# Altium PCB STM8S103.PcbDoc
Units mil, origin at the board's own origin, x right, y up, seen from the top; angles counter-clockwise.
Board outline 1305 x 1305 mil, 2 copper layers (Top Layer, Bottom Layer); 35 components, 38 nets, 164 pads, 62 vias.
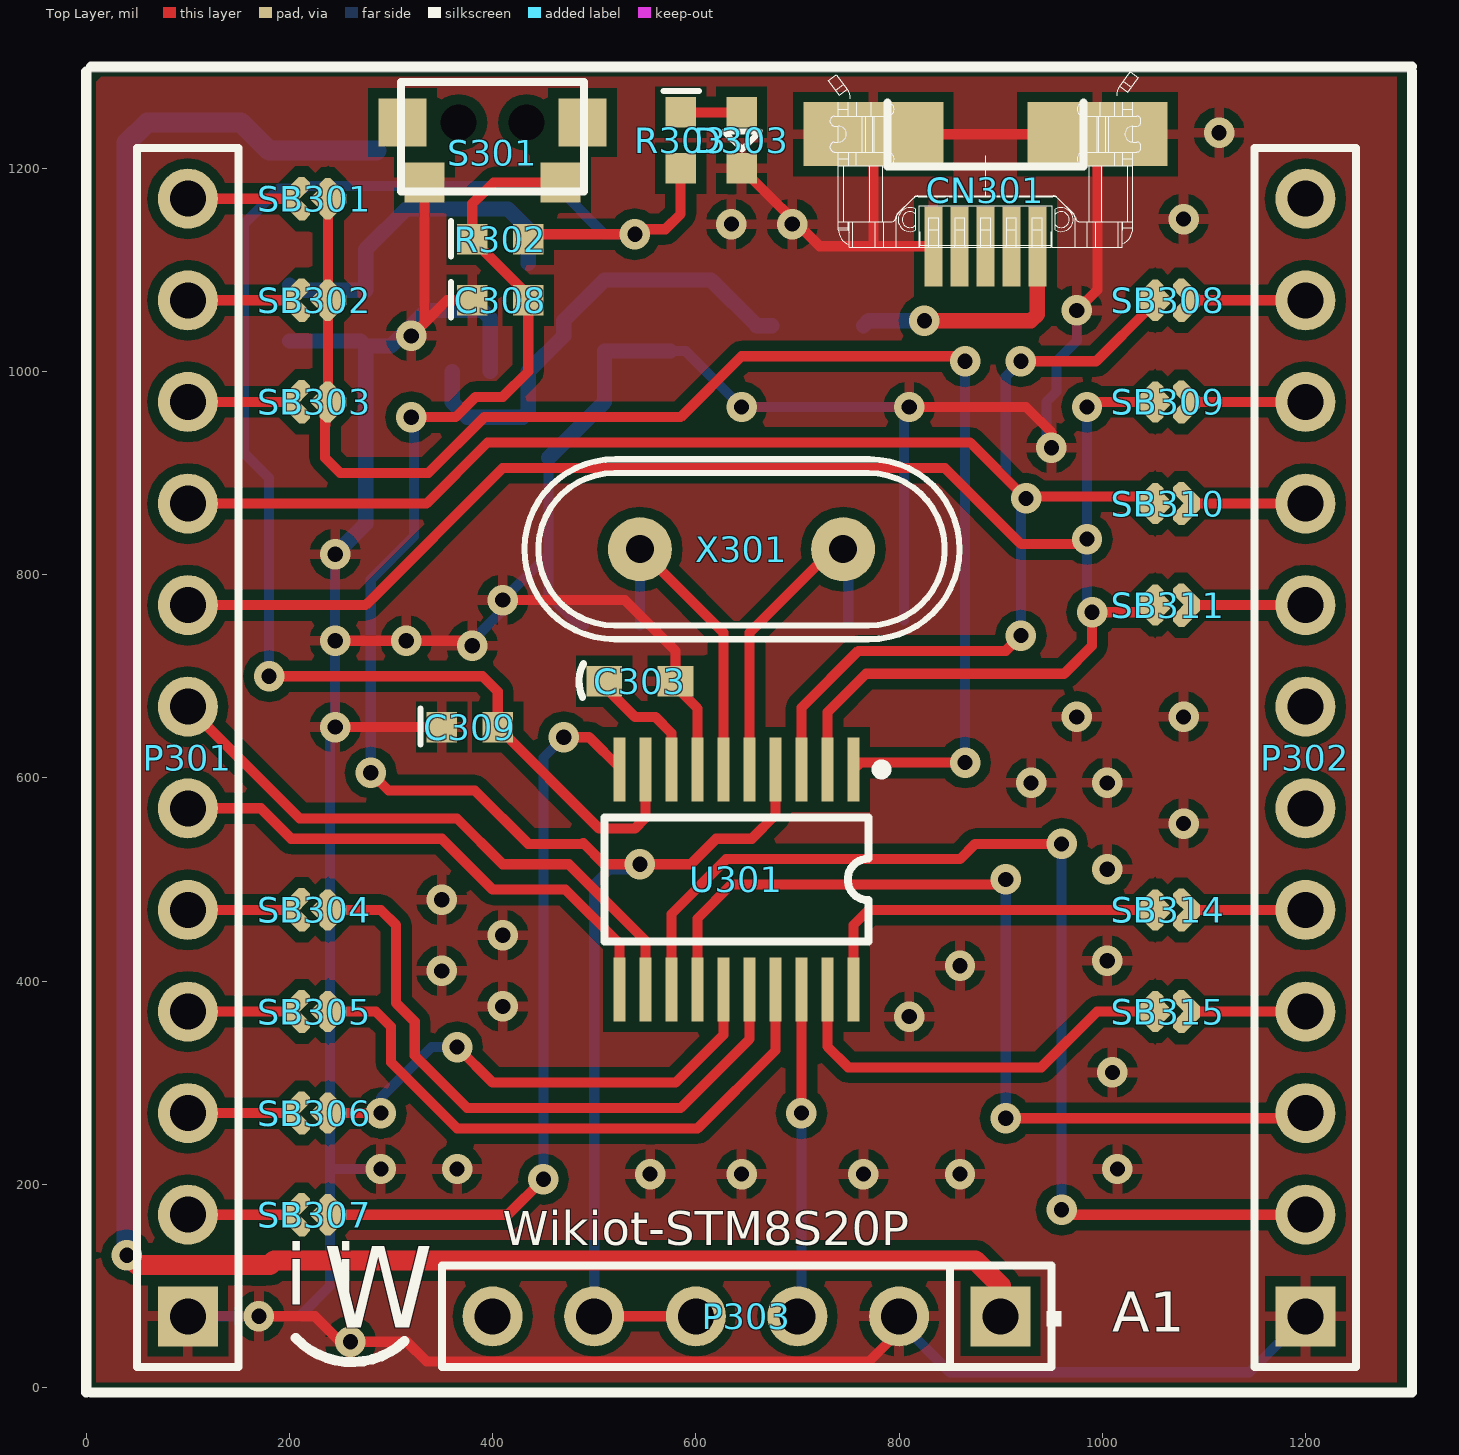
[diagram p0: Top Layer view]
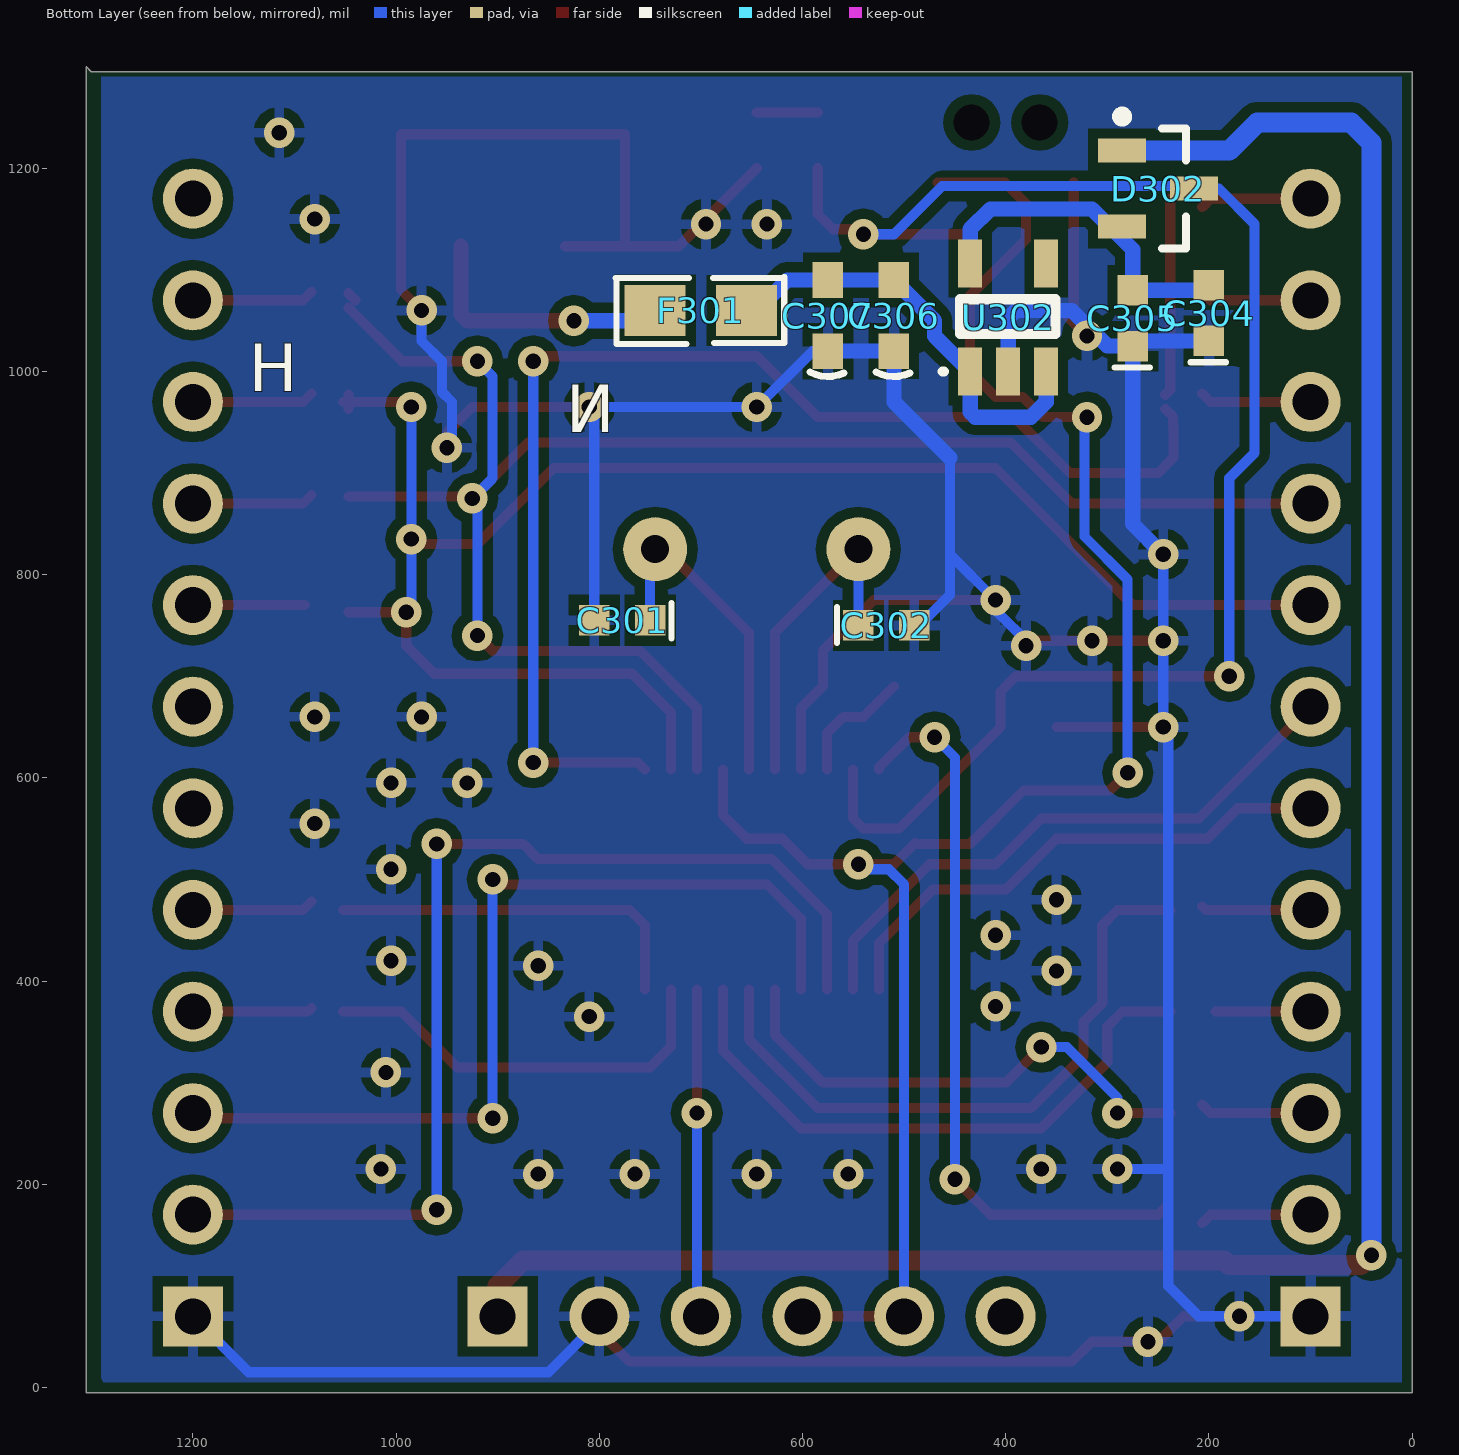
[diagram p1: Bottom Layer view, seen from below]

## Layer stack, top to bottom
Top Solder: solder mask 0.4, Solder Resist, Dk 3.5
Top Layer: signal copper 1.4
Dielectric 1: dielectric 12.6, FR-4, Dk 4.8
Bottom Layer: signal copper 1.4
Bottom Solder: solder mask 0.4, Solder Resist, Dk 3.5

## Board outline
0,-5 0,1295 1300,1295 1305,1300 1305,-5

## Design rules (kind name [scope] priority, off if disabled: settings)
Clearance [All] p1: gap=10
PolygonConnect [All] p1: connectstyle=Relief reliefconductorwidth=10 reliefentries=4 polygonreliefangle="90 Angle" airgapwidth=10
RoomDefinition STM8S103 [InComponentClass('STM8S103')] p1: confinementstyle=ConfineIn formatcopy=TRUE lockcomponents=FALSE outline 5,-15 1300,-15 1300,1305 5,1305
RoutingVias [All] p1: holewidth=12 width=30 viastyle="Through Hole" minholewidth=12 minwidth=25 maxholewidth=28 maxwidth=50
SolderMaskExpansion [All] p1: expansion=4
UnpouredPolygon [All] p1: allowunpoured=FALSE
Width [All] p1: maxlimit=50 minlimit=10 preferedwidth=10
29 further rules are at their usual default settings.

## Components (designator, comment, footprint, x,y, rotation, side; value= is the part's Value field where it differs from the comment)
C301 "20pF" 0603M 750,755 r0 bottom
C302 "20pF" 0603M 545,750 r180 bottom
C303 "0.1uF" C0603L 545,695 r0 top
C304 "1uF" 0603M 200,1030 r90 bottom
C305 "0.1uF" 0603M 275,1025 r90 bottom
C306 "Cap" C0603L 510,1055 r90 bottom
C307 "Cap" C0603L 575,1055 r90 bottom
C308 "100nF" 0603M 380,1070 r0 top
C309 "0.1uF" 0603M 350,650 r0 top
CN301 "USB-Micro" USB-MICRO-Female-Lite 885,1230 r0 top
D302 "BAT54C" BAT54C 250,1180 r180 bottom
D303 "RED" 0603pn 645,1255 r270 top
F301 "500mA" 0805 655,1060 r0 bottom
P301 "Synio Header-L 12-Pin" HDR1X12 100,70 r90 top locked
P302 "Synio Header-R 12-Pin" HDR1X12 1200,70 r90 top locked
P303 "Synio Power Header 6 Pin" HDR1X6/2.54MM 900,70 r180 top locked
R302 "100K" 0603M 380,1130 r0 top
R303 "1K" 0603M 585,1255 r270 top
S301 "RESET" KEY-2x4-SMD 400,1245 r0 top
SB301 "Circuit Breaker" JP2_SMD 225,1170 r0 top
SB302 "Circuit Breaker" JP2_SMD 225,1070 r0 top
SB303 "Circuit Breaker" JP2_SMD 225,970 r0 top
SB304 "Circuit Breaker" JP2_SMD 225,470 r0 top
SB305 "Circuit Breaker" JP2_SMD 225,370 r0 top
SB306 "Circuit Breaker" JP2_SMD 225,270 r0 top
SB307 "Circuit Breaker" JP2_SMD 225,170 r0 top
SB308 "Circuit Breaker" JP2_SMD 1065,1070 r180 top
SB309 "Circuit Breaker" JP2_SMD 1065,970 r180 top
SB310 "Circuit Breaker" JP2_SMD 1065,870 r180 top
SB311 "Circuit Breaker" JP2_SMD 1065,770 r180 top
SB314 "Circuit Breaker" JP2_SMD 1065,470 r180 top
SB315 "Circuit Breaker" JP2_SMD 1065,370 r180 top
U301 "STM8S003F3P6" TSSOP20 640,500 r180 top
U302 "LDO" SOT23-5 435,1000 r180 bottom
X301 "8MHz" XTAL_49S 645,825 r180 top

## Footprints (in the part's own frame and the unit in brackets; to place one, negate y for a bottom-side part, rotate by r counter-clockwise, add the part's x,y. Pads: shape width x height; smd on the part's side, far side on the other; paste and mask are expansions set on the pad)
0603M [mil]
  rect 30x30 smd: 1(0,0) 2(55,0)
  silkscreen extent -21,-17 -21,18, body extent -5,-15 60,15, height 43
0603pn [mil]
  rect 30x30 smd: 1(0,0) 2(55,0)
  silkscreen extent 19,-17 36,18
0805 [mil]
  rect 60x50 smd: 1(0,0) 2(90,0)
  silkscreen extent -37,-33 129,33
BAT54C [mm] "SOT23, 3-Leads, Body 2.9x1.3mm, Pitch 0.95mm, Lead Span 2.5mm, IPC High Density"
  rect 1.2x0.6 smd: 1(-0.9,0.95) 2(-0.9,-0.95) 3(0.9,0)
  silkscreen extent -1.02,-1.5 0.7,1.92, body extent -0.7,-1.5 0.7,1.5, height 1.1
C0603L [mil]
  rect 35x30 smd: 1(-35,0) 2(35,0)
  silkscreen extent -60,-16 -56,18, body extent -31,-16 32,15, height 24
HDR1X6/2.54MM [mm] "Connector; Header; 6 Position"
  rect 1.5x1.5 hole 0.9: 1(0,0)
  round 1.5 hole 0.9: 2(2.54,0) 3(5.08,0) 4(7.62,0) 5(10.16,0) 6(12.7,0)
  silkscreen extent -1.52,-1.27 13.97,1.27
HDR1X12 [mm] "Connector; Header; 12 Position"
  rect 1.5x1.5 hole 0.9: 1(0,0)
  round 1.5 hole 0.9: 2(2.54,0) 3(5.08,0) 4(7.62,0) 5(10.16,0) 6(12.7,0) 7(15.24,0) 8(17.78,0) 9(20.32,0) 10(22.86,0) 11(25.4,0) 12(27.94,0)
  silkscreen extent -1.27,-1.27 29.21,1.27
JP2_SMD [mil]
  oct 15x30 smd rot 45: 1(-18,-8) 2(18,7)
  oct 15.75x30 smd rot 135: 1(-18,8)
  rect 26x26 smd rot 45: 2(13,0)
  oct 15x30 smd rot 135: 2(18,-7)
KEY-2x4-SMD [mm] "6.8MM,2.8MM,SMD"
  rect 1.2x1.2 smd: 0(-2.25,0) 0(2.25,0)
  rect 1x1 smd: 1(-1.7,-1.5) 2(1.7,-1.5)
  round 0.8 hole 0.9 unplated: MH1(0.85,0) MH2(-0.85,0)
  silkscreen extent -2.29,-1.73 2.29,1.02, body extent -2.28,-1.6 2.29,0.94, height 1.1
SOT23-5 [mm]
  rect 0.6x1.2 smd: 1(0,0) 2(0.95,0) 3(1.9,0) 4(1.9,2.7) 5(0,2.7)
  silkscreen extent -0.69,0 2.13,1.8, body extent -0.32,0.7 2.35,2.1, height 1.1
TSSOP20 [mm] "Shrink Small Outline; 20 Leads; Body Width 4.4 mm; Pitch 0.65 mm"
  rect 0.3x1.6 smd: 1(-2.925,-2.75) 2(-2.275,-2.75) 3(-1.625,-2.75) 4(-0.975,-2.75) 5(-0.325,-2.75) 6(0.325,-2.75) 7(0.975,-2.75) 8(1.625,-2.75) 9(2.275,-2.75) 10(2.925,-2.75) 11(2.925,2.75) 12(2.275,2.75) 13(1.625,2.75) 14(0.975,2.75) 15(0.325,2.75) 16(-0.325,2.75) 17(-0.975,2.75) 18(-1.625,2.75) 19(-2.275,2.75) 20(-2.925,2.75)
  silkscreen extent -3.75,-2.87 3.3,1.55
USB-MICRO-Female-Lite [mm] "Connector; USB2.0, Type B, SM; 5 Position; Right Angle"
  rect 3.5x1.6 smd: 0(-2.802,0.088) 0(2.798,0.088)
  rect 0.45x2 smd: 1(1.298,-2.714) 2(0.648,-2.714) 3(-0.002,-2.714) 4(-0.652,-2.714) 5(-1.302,-2.714)
  silkscreen extent -3.92,-2.74 3.88,1.65
XTAL_49S [mm] "Hole 1.6mm"
  round 1.6 hole 0.7: 1(2.54,0) 2(-2.54,0)
  silkscreen extent -5.45,-2.25 5.42,2.25

## Part data
C301 C302 C308: library part CAP, "Capacitor"
C303 C304 C305 C309: library part Cap, "Capacitor"
C306 C307: "Capacitor"
D302: "DOUBLE SHOTTKEY DIODES"
D303: library part LED0, "Typical INFRARED GaAs LED"
F301: library part "Fuse 1", "Fuse"
P301: "Synio Header-L, 12-Pin"
P302: "Synio Header-R, 12-Pin"
R302: library part res1, "Resistor"
R303: library part Res2, "Resistor"
S301: library part SW-PB, "Switch"
U301: library part STM8S103F2P6, "ST 8-bit  Microcontroller"
U302: library part LDO-SOT23-5, "General LDO SOT23-5"
X301: library part XTAL, "Crystal Oscillator"

## Via types
v1: diameter 30, hole 15, Top Layer to Bottom Layer, 62 vias

## Nets (pads, with @x,y where several pads share a name; then routed paths per layer and width w, separated by ;. In a path a pad name is that pad's centre, name@x,y a point inside that pad or via, vN(x,y) a via of type N, cw(c..) or ccw(c..) an arc to the next point about the centre after c; other vN are vias at no path point)
D3V3: C309.2 D302.3 R302.2 R303.2 U301.9 | length 1589.7
  Top Layer w10: v1(180,700) 390,700 405,685 C309.2 505,550 540,550 550.43,560.43 U301.9 ; R302.2 440,1135 v1(540,1135) ; v1@540,1130 550,1140 570,1140 585,1155 R303.2
  Bottom Layer w10: v1(180,700) 180,895 155,920 155,1145 190,1180 D302.3 214.57,1182.5 462.5,1182.5 510,1135 v1(540,1135)
D5V: C306.2 C307.2 F301.1 U302.1 U302.3 | length 457.9
  Bottom Layer w15: U302.3 360.2,969.8 375,955 430,955 435,960 U302.1 470,1035 470,1050 C306.2 C307.2 615,1090 660,1045 F301.1@675,1045
EX_D3V3: D302.1 P303.1 | length 2271.3
  Top Layer w20: v1(40,130) 40.94,130 50.47,120.47 180.47,120.47 185,125 205,125 875,125 900,100 P303.1
  Bottom Layer w20: v1@40,125 v1(40,130) 40,1225 60,1245 152.4,1245 180,1217.4 D302.1
GND: C301.2 C302.2 C303.2 C304.1 C305.1 C306.1 C307.1 C308.1 C309.1 CN301.0 CN301.5 D303.2 P301.1 P302.1 P303.2 S301.1 U301.7 U302.2 | length 5378.8
  Top Layer w10: v1(170,70) 225,70 250,45 v1(260,45) 315.47,45 335,25.47 770.47,25.47 800,55 P303.2 ; v1(245,650) C309.1 ; v1(245,735) v1(315,735) 375,735 v1(380,730) ; v1(320,1035) 333.07,1048.07 ; S301.1 333.07,1048.07 ; C308.1 355,1070 333.07,1048.07 ; v1(410,775) 530,775 580,725 C303.2 ; C303.2@580,690 601.61,668.39 U301.7 ; D303.2 721.86,1123.14 776.86,1123.14 ; v1(810,965) 925,965 950,940 v1(950,925) ; CN301.5 776.86,1123.14 ; v1(975,1060) 995.17,1080.17 995.17,1233.46 774.7,1233.46 774.7,1125.3 776.86,1123.14
  Bottom Layer w10: P301.1 210,70 ; v1(170,70) 210,70 ; v1(245,820) v1(245,735) v1(245,650) 240,645 240,215 ; v1(290,215) 240,215 ; v1@320,1025 v1(320,1035) ; v1@375,730 410,765 v1(410,775) 455,820 ; 455,830 455,820 ; 455,915 455,820 ; C302.2 485,750 455,780 455,820 ; C307.1 590,1020 v1(645,965) v1(810,965) 805,960 C301.2 ; P303.2 800,65 850,15 1145,15 P302.1 ; v1(950,925) 945,930 945,970 955,980 955,1010 975,1030 v1(975,1060) ; 210,70 240,100 240,215
  Bottom Layer w15: C304.1 270,1030 C305.1 ; v1(245,820) 275,850 C305.1 ; U302.2 397.6,1052.4 390,1060 335,1060 300,1025 C305.1 ; 455,915 510,970 C306.1 C307.1
  other v1: 555,210 645,210 765,210 860,210 365,215 1015,215 1010,310 810,365 410,375 350,410 860,415 1005,420 410,445 350,480 1005,510 1080,555 930,595 1005,595 975,660 1080,660 635,1145 695,1145 1080,1150 1115,1235
NetC301_1: C301.1 U301.5 X301.2 | length 357.9
  Top Layer w10: U301.5 652.8,742.8 735,825 X301.2 X301.2@745,800
  Bottom Layer w10: X301.2 750,820 C301.1
NetC302_1: C302.1 U301.6 X301.1 | length 325.8
  Top Layer w10: X301.1 627.2,742.8 U301.6
  Bottom Layer w10: C302.1 X301.1
NetC303_1: C303.1 U301.8 | length 120.8
  Top Layer w10: C303.1@510,690 540,660 560,660 576.02,643.98 U301.8
NetC304_2: C304.2 C305.2 D302.2 U302.5 | length 335.6
  Bottom Layer w15: C304.2 205,1080 C305.2 275,1120 315,1160 415,1160 435,1140 U302.5
NetCN301_1: CN301.1 F301.2 | length 242.7
  Top Layer w15: v1(825,1050) 930,1050 936.12,1056.12 CN301.1
  Bottom Layer w15: F301.2@765,1045 770,1050 v1(825,1050)
NetD303_1: D303.1 R303.1 | length 60
  Top Layer w10: R303.1 D303.1
NetP301_2: P301.2 SB307.1 | length 110.1
  Top Layer w10: P301.2 198.4,170 SB307.1@206.7,161.7
NetP301_3: P301.3 SB306.1 | length 110.1
  Top Layer w10: P301.3 198.4,270 SB306.1@206.7,278.3
NetP301_4: P301.4 SB305.1 | length 93.4
  Top Layer w10: P301.4 193.4,370
NetP301_5: P301.5 SB304.1 | length 108.1
  Top Layer w10: P301.5 203.4,470 SB304.1@206.7,473.3
NetP301_10: P301.10 SB303.1 | length 110.1
  Top Layer w10: P301.10 198.4,970 SB303.1@206.7,978.3
NetP301_11: P301.11 SB302.1 | length 110.1
  Top Layer w10: P301.11 198.4,1070 SB302.1@206.7,1078.3
NetP301_12: P301.12 SB301.1 | length 110.1
  Top Layer w10: P301.12 198.4,1170 SB301.1@206.7,1161.7
NetP302_4: P302.4 SB315.1 | length 118.1
  Top Layer w10: SB315.1@1083.3,373.3 1086.6,370 P302.4
NetP302_5: P302.5 SB314.1 | length 120.1
  Top Layer w10: SB314.1@1083.3,478.3 1091.6,470 P302.5
NetP302_8: P302.8 SB311.1 | length 110
  Top Layer w10: SB311.1@1090,770 P302.8
NetP302_9: P302.9 SB310.1 | length 120.1
  Top Layer w10: SB310.1@1083.3,878.3 1091.6,870 P302.9
NetP302_10: P302.10 SB309.1 | length 120.1
  Top Layer w10: SB309.1@1083.3,978.3 1091.6,970 P302.10
NetP302_11: P302.11 SB308.1 | length 120.1
  Top Layer w10: SB308.1@1083.3,1078.3 1091.6,1070 P302.11
NRST: C308.2 P303.4 P303.5 R302.1 S301.2 U301.4 | length 1864
  Top Layer w10: v1(280,605) 297.5,587.5 382.5,587.5 435,535 488.28,535 ; v1(320,955) 363.43,955 383.43,975 410,975 435,1000 C308.2 435,1075 R302.1 380,1165 400.94,1185.94 S301.2 ; 489.14,535.86 510,515 v1(545,515) 595,515 620,540 655,540 678.39,563.39 U301.4 ; P303.5 P303.4
  Bottom Layer w10: v1(280,605) 280,635 280,795 322.5,837.5 322.5,952.5 v1(320,955) ; P303.5 500,495 515,510 540,510 v1(545,515)
PA3/TIM2_CH3/CSN: SB307.2 U301.10 | length 736.8
  Top Layer w10: SB307.2@243,177 250,170 415,170 v1(450,205) ; v1(470,640) 495,640 524.84,610.16 U301.10
  Bottom Layer w10: v1(450,205) 450,620 v1(470,640)
PB4/SCL1: P301.7 U301.12 | length 593.7
  Top Layer w10: P301.7 210,560 365,560 410,515 475,515 550.43,439.57 U301.12
PB5/SDA1: P301.6 U301.11 | length 525.1
  Top Layer w10: P301.6 171.72,570 201.72,540 350,540 400,490 471.72,490 524.84,436.87 U301.11
PC3/TIM1_CH3: P302.2 U301.13 | length 1088.9
  Top Layer w10: U301.13 576.02,466.02 630,520 860,520 875,535 v1(960,535) ; v1(960,175) 965,170 P302.2
  Bottom Layer w10: v1(960,175) v1(960,535)
PC4/TIM1_CH4: P302.3 U301.14 | length 921.2
  Top Layer w10: U301.14 601.61,461.61 635,495 900,495 v1(905,500) ; v1(905,265) 1195,265 P302.3
  Bottom Layer w10: v1(905,265) v1(905,500)
PC5/SCK/TIM2_CH1: SB306.2 U301.15 | length 517.6
  Top Layer w10: SB306.2@238,270 v1(290,270) ; v1(365,335) 400,300 580,300 627.2,347.2 U301.15
  Bottom Layer w10: v1(290,270) 300,270 290,280 290,285 340,335 v1(365,335)
PC6/MOSI/TIM1_CH1: SB304.2 U301.16 | length 637
  Top Layer w10: SB304.2@238,470 290,470 305,455 305,378.28 323.28,360 323.28,326.72 375,275 585,275 652.8,342.8 U301.16
PC7/MISO/TIM1_CH2: SB305.2 U301.17 | length 600.4
  Top Layer w10: SB305.2@238,370 285,370 300,355 300,320 365,255 601.77,255 678.39,331.61 U301.17
PD2/AIN3/TIM2_CH3: SB315.2 U301.19 | length 410
  Top Layer w10: U301.19 729.57,335.43 750,315 940,315 995,370 SB315.2@1052,370
PD3/AIN4/TIM2_CH2: SB314.2 U301.20 | length 366.4
  Top Layer w10: U301.20 755.16,455.16 770,470 SB314.2@1052,470
PD4/BEEP/TIM2_CH1: SB301.2 SB302.2 SB303.2 U301.1 | length 1450.1
  Top Layer w10: SB301.2@238,1170 238,1070 238,982 SB303.2@243,977 ; SB303.2@243,963 235.26,955.26 235.26,947.57 235,947.57 235,915 250,900 336.72,900 391.72,955 585,955 645,1015 870,1015 v1(865,1010) ; U301.1 761.89,615 v1(865,615)
  Bottom Layer w10: v1(865,615) v1(865,1010)
PD5/AIN5/TXD: P301.8 SB309.2 SB311.2 U301.2 | length 1695
  Top Layer w10: P301.8 275,770 410,905 845,905 920,830 980,830 v1(985,835) ; U301.2 729.57,664.57 767.5,702.5 962.5,702.5 990,730 v1(990,763) SB311.2@1047,763 ; v1(985,965) 990,970 SB309.2@1047,970 ; SB309.2@1047,963 SB309.2@1047,970 ; SB309.2@1047,977 SB309.2@1047,970 ; SB309.2@1052,970 SB309.2@1047,970
  Bottom Layer w10: v1(985,965) v1(985,835) 985,768 v1(990,763)
PD6/AIN6/RXD: P301.9 SB308.2 SB310.2 U301.3 | length 1739.1
  Top Layer w10: P301.9 335,870 395,930 870,930 v1(925,875) ; U301.3 703.98,668.98 760,725 905,725 v1(920,740) ; v1(920,1010) 994,1010 SB308.2@1047,1063 ; v1@935,877 SB310.2@1047,877 ; SB308.2@1040,1070 SB308.2@1047,1077
  Bottom Layer w10: v1(920,740) v1@920,880 ; v1(920,1010) 905,995 905,895 v1(925,875)
SWIM: P303.3 U301.18 | length 329
  Top Layer w10: P303.3 P303.3@703.98,73.98 ; v1(703.98,270) U301.18
  Bottom Layer w10: P303.3 703.98,73.98 v1(703.98,270)
pads on no net: CN301.2 CN301.3 CN301.4 P302.6 P302.7 P302.12 P303.6 S301.0 S301.MH1 S301.MH2 U302.4

## Polygon pours and split planes (outlines as drawn)
GND on Bottom Layer "Top Layer-No Net" (solid, remove dead copper, pour order 2): 10,1290 1290,1290 1290,10 1295,5 10,5
GND on Top Layer "Top Layer-No Net" (solid, remove dead copper, pour order 4): 10,1285 15,1290 1290,1290 1290,5 10,5

## Silkscreen, mask and mechanical layers (free items; w line width, h text height)
Top Overlay:
  lines w10: 0,-5 0,1295 ; 5,-5 1305,-5 1305,1295 ; 5,1300 1305,1300 ; 206.28,48.58 ccw(c261.28,100.58) 313.28,45.58
  text "Wikiot-STM8S20P" at 410,140 h33.46
  text "i i" at 195.28,81.58 h60
  text "W" at 233.28,58.58 h80
  text "A1" at 1010,55 h39.37
Bottom Overlay:
  text "H" at 1145,965 h80
  text "N" at 785,925 h80